# EAGLE board TalkingClock_old (EAGLE 8.6.3)

Size 79.68 x 74.92 mm. Coordinates in mm from the lower left corner, seen from the top.
Outline: 0,0 79.68,0 79.68,74.92 0,74.92 0,0
Copper layers (1*16): Top 0.035mm / dielectric 1.5mm / Bottom 0.035mm
Design rules "default *": minimum track width 40mil, minimum drill 1mm, track to track 40mil, track to pad 40mil, pad to pad 6mil, via to via 6mil, smd to smd 6mil, copper to edge 80mil, drill to drill 50mil, minimum pad ring 10mil, minimum via ring 8mil, stop-mask expansion 4mil, vias tented up to drill 0mil, thermal gap 10mil
Holes 2.54 mm at 2.54,72.39 76.2,72.39 77.47,2.54 2.54,2.54

## Footprints (pad centres in the part's own frame; a part is rotated, then mirrored left to right if it is on the bottom)
ARDUINO-PRO-MINI = drill 1: J1.1 -15.24,6.35; J1.2 -15.24,3.81; J1.3 -15.24,1.27; J1.4 -15.24,-1.27; J1.5 -15.24,-3.81; J1.6 -15.24,-6.35; J2.1 -1.27,5.08; J2.2 -3.81,5.08; J3.1 15.24,0; J3.2 15.24,2.54; J3.3 15.24,5.08; J6.1 -12.7,7.62; J6.2 -10.16,7.62; J6.3 -7.62,7.62; J6.4 -5.08,7.62; J6.5 -2.54,7.62; J6.6 0,7.62; J6.7 2.54,7.62; J6.8 5.08,7.62; J6.9 7.62,7.62; J6.10 10.16,7.62; J6.11 12.7,7.62; J6.12 15.24,7.62; J7.1 15.24,-7.62; J7.2 12.7,-7.62; J7.3 10.16,-7.62; J7.4 7.62,-7.62; J7.5 5.08,-7.62; J7.6 2.54,-7.62; J7.7 0,-7.62; J7.8 -2.54,-7.62; J7.9 -5.08,-7.62; J7.10 -7.62,-7.62; J7.11 -10.16,-7.62; J7.12 -12.7,-7.62
CAP-PTH-SMALL-KIT = drill 1.016 pad 2.032: 1 -1.397,0; 2 1.397,0
CPOL-RADIAL-5MM-10MM = drill 0.9 pad 1.93 square: + 2.5,0 | drill 0.9 pad 1.93: - -2.5,0
CPOL-RADIAL-2.5MM-6.5MM = drill 0.7 pad 1.651 square: 1 1.25,0 | drill 0.7 pad 1.651: 2 -1.25,0
DCJ0202 = drill 1 pad 2 long: 1 0,3.1; 2 4.8,0; 3 0,-3
TACTILE_SWITCH_PTH_6.0MM = drill 1.016 pad 1.88: 1 -3.251,2.261; 2 3.251,2.261; 3 -3.251,-2.261; 4 3.251,-2.261
LED5MM = drill 0.813 octagon: A -1.27,0; K 1.27,0
0204/7 = drill 0.813 octagon: 1 -3.81,0; 2 3.81,0
DFPLAYER-MINI-MODULE = drill 1 square: 1 -8.89,-8.89 | drill 1: 2 -6.35,-8.89; 3 -3.81,-8.89; 4 -1.27,-8.89; 5 1.27,-8.89; 6 3.81,-8.89; 7 6.35,-8.89; 8 8.89,-8.89; 9 8.89,8.89; 10 6.35,8.89; 11 3.81,8.89; 12 1.27,8.89; 13 -1.27,8.89; 14 -3.81,8.89; 15 -6.35,8.89; 16 -8.89,8.89
1X2-3.5MM = drill 1 pad 2.184: 1 1.8,0; 2 -1.7,0
RTRIM4G/J = smd 1.3 x 1.3: 1 -1.15,-2.75; 3 1.15,-2.75 | smd 2 x 1.3: 2 0,2.75
1X04 = drill 1.016 pad 1.88: 1 0,0; 2 2.54,0; 3 5.08,0; 4 7.62,0
AMPLIFIER-PAM8403 = drill 1: +5V 5.715,-8.89; GND 8.255,-8.89; IN.COM -5.08,-8.89; IN.L -7.62,-8.89; IN.R -2.54,-8.89; OUT.L+ -4.445,8.89; OUT.L- -6.985,8.89; OUT.R+ 4.445,8.89; OUT.R- 6.985,8.89

## Placement (x,y rotation side)
ARDUINO  ARDUINO-PRO-MINI-5.0V  [ARDUINO-PRO-MINI]  55.88,55.88 270 top
C1  0.1uF  [CAP-PTH-SMALL-KIT]  49.53,22.86 0 top
C2  1000mF  [CPOL-RADIAL-5MM-10MM]  49.53,13.97 180 top
C3  220uF  [CPOL-RADIAL-2.5MM-6.5MM]  72.39,57.15 0 top
C4  0.1uF  [CAP-PTH-SMALL-KIT]  72.39,64.77 180 top
C5  0.1uF  [CAP-PTH-SMALL-KIT]  39.37,13.97 90 top
C6  0.1uF  [CAP-PTH-SMALL-KIT]  34.29,12.7 180 top
C7  0.1uF  [CAP-PTH-SMALL-KIT]  39.37,31.75 90 top
DC_JACK  DCJ0202  [DCJ0202]  64.77,13.97 0 top
H  Hour  [TACTILE_SWITCH_PTH_6.0MM]  36.83,62.23 180 top
LED  [LED5MM]  72.39,29.21 270 top
LED_PWR  120E  [0204/7]  68.58,22.86 0 top
M  Min  [TACTILE_SWITCH_PTH_6.0MM]  36.83,52.07 180 top
MD  Mode  [TACTILE_SWITCH_PTH_6.0MM]  36.83,43.18 0 top
PLAYER  DFPLAYER-MINI-MODULE  [DFPLAYER-MINI-MODULE]  16.51,50.8 270 top
PRE_SPK_OUT  SPEAKER  [1X2-3.5MM]  6.35,35.56 270 top
R_RX  1K  [0204/7]  11.43,66.04 0 top
R_TX  1K  [0204/7]  11.43,69.85 0 top
R_VOL  10K  [RTRIM4G/J]  26.67,10.16 180 top
SPEAKER  SPEAKER  [1X2-3.5MM]  6.35,25.4 270 top
TM_1637_OUT  [1X04]  73.66,40.64 90 top
U$1  AMPLIFIER-PAM8403  [AMPLIFIER-PAM8403]  25.4,25.4 90 top

## Library data of the parts
ARDUINO PLAYER U$1 = diy-modules
C1 C4-C7 = SparkFun-Capacitors; PROD_ID: CAP-08370
C2 = SparkFun-Capacitors; PROD_ID: CAP-09538
C3 = SparkFun-Capacitors; PROD_ID: CAP-08439
DC_JACK = con-jack; OC_FARNELL: unknown; OC_NEWARK: unknown
H M MD = SparkFun-Switches; PROD_ID: SWCH-08441; SF_SKU: COM-00097
LED = led
LED_PWR R_RX R_TX = rcl; SPICEPREFIX: R
PRE_SPK_OUT SPEAKER = adafruit
R_VOL = resistor
TM_1637_OUT = SparkFun-Connectors; PROD_ID: CONN-09696

## Nets
CLK: ARDUINO.J6.12 TM_1637_OUT.1
DIO: ARDUINO.J6.11 TM_1637_OUT.2
GND: ARDUINO.J3.1 ARDUINO.J6.2 ARDUINO.J7.9 C1.2 C2.- C3.2 C4.2 C7.2 DC_JACK.1 H.3 LED_PWR.1 M.3 MD.3 PLAYER.7 PLAYER.10 R_VOL.1 TM_1637_OUT.4 U$1.GND
HOUR: ARDUINO.J7.5 H.1
MIN: ARDUINO.J7.4 M.1
MODE: ARDUINO.J7.3 MD.1
N$1: ARDUINO.J7.12 R_TX.2
N$2: ARDUINO.J7.11 R_RX.2
N$3: LED.K LED_PWR.2
N$6: C6.2 U$1.IN.L
N$7: C5.2 U$1.IN.R
N$8: SPEAKER.1 U$1.OUT.L+
N$9: SPEAKER.2 U$1.OUT.R+
RAW: ARDUINO.J6.1
RX: PLAYER.3 R_TX.1
SPK+: C5.1 C6.1 PLAYER.6 PRE_SPK_OUT.2 R_VOL.2 R_VOL.3
SPK-: PLAYER.8 PRE_SPK_OUT.1
TX: PLAYER.2 R_RX.1
VCC: ARDUINO.J6.4 C1.1 C2.+ C3.1 C4.1 C7.1 DC_JACK.3 LED.A PLAYER.1 TM_1637_OUT.3 U$1.+5V

## Tracks (layer width: path | path; a pad name or v marks a point on that pad's centre or on a via)
CLK  (1 unrouted)
DIO  (1 unrouted)
GND  (17 unrouted)
HOUR  (1 unrouted)
MIN  (1 unrouted)
MODE  (1 unrouted)
N$1  (1 unrouted)
N$2  (1 unrouted)
N$3  (1 unrouted)
N$6  (1 unrouted)
N$7  (3 unrouted)
N$8  (1 unrouted)
N$9  (1 unrouted)
RX  (1 unrouted)
SPK+  (5 unrouted)
SPK-  (1 unrouted)
TX  (1 unrouted)
VCC  (10 unrouted)